# EAGLE board esp_sense (EAGLE 9.3.0)
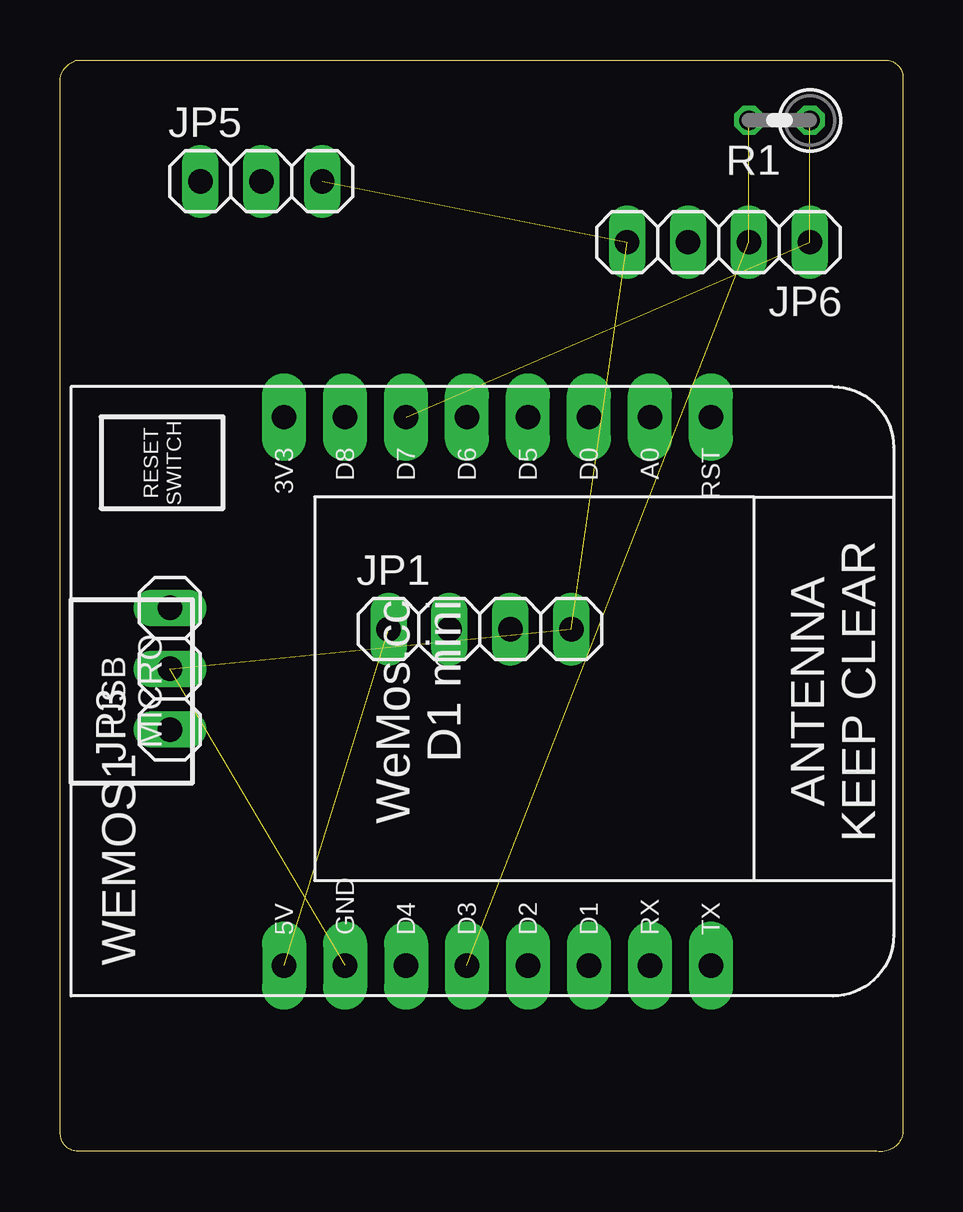
[diagram p0: board, top side]
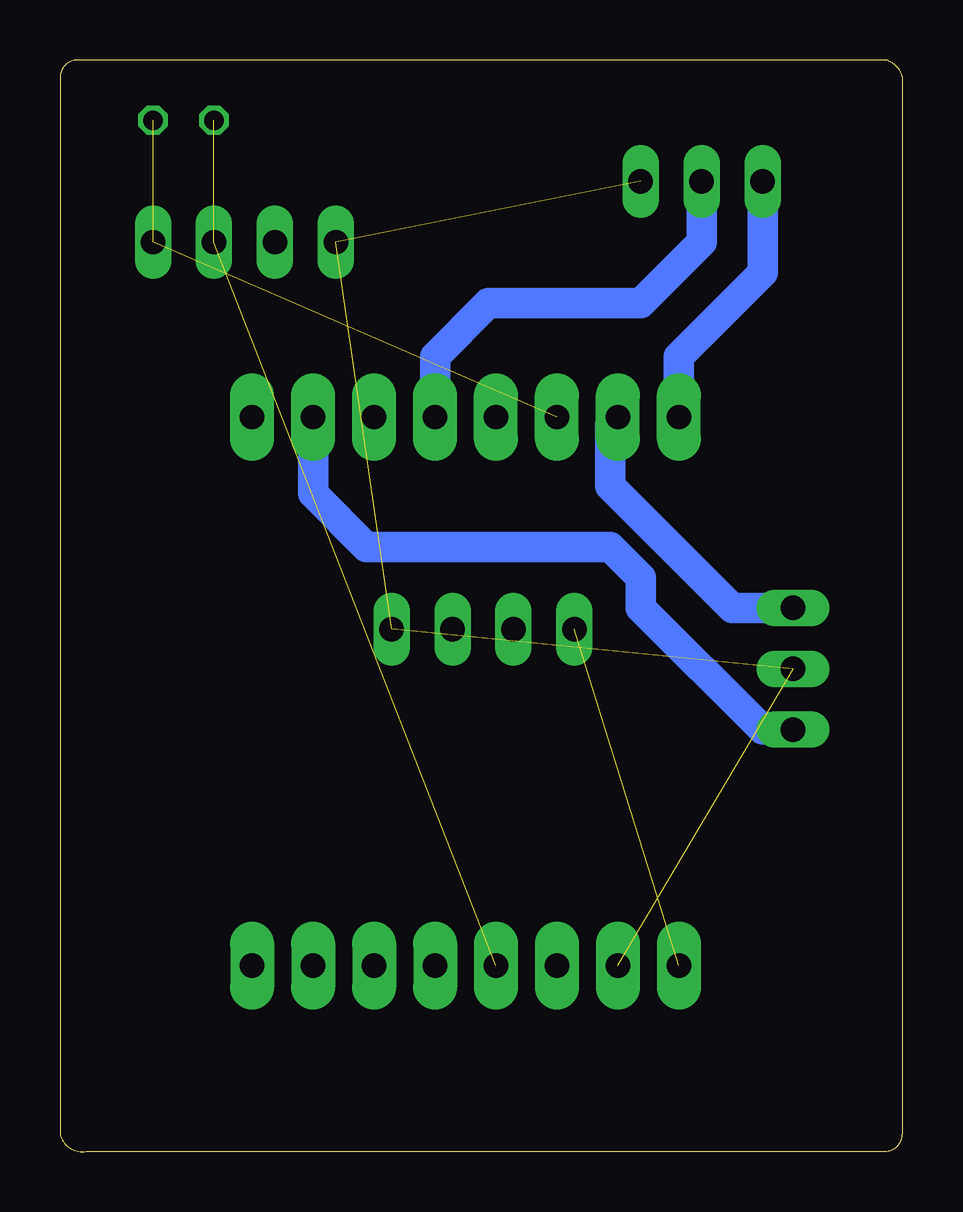
[diagram p1: board, bottom side, seen from below]

Size 35.12 x 45.51 mm. Coordinates in mm from the lower left corner, seen from the top.
Outline: 0.02,44.41 arc-90 0.75,45.51 34.39,45.51 arc-90 35.12,44.78 35.12,0.75 arc-90 34.03,0.02 0.75,0.02 arc-90 0.02,0.75 0.02,44.41
Copper layers (1*16): Top 0.035mm / dielectric 1.6mm / Bottom 0.035mm
Design rules "Elecrow_2-layer_PCB_eagle_rule *": minimum track width 6mil, minimum drill 12mil, track to track 6mil, track to pad 6mil, pad to pad 6mil, via to via 8mil, smd to smd 0mil, copper to edge 20mil, drill to drill 10mil, minimum pad ring 6mil, minimum via ring 6mil, stop-mask expansion 0mil, vias tented up to drill 100mil, thermal gap 10mil
Holes 2.75 mm at -14.12,39.88
Holes 1.3 mm at -8.29,40.91 -5.83,40.91

## Footprints (pad centres in the part's own frame; a part is rotated, then mirrored left to right if it is on the bottom)
1X04 = drill 1.016 long: 1 -3.81,0; 2 -1.27,0; 3 1.27,0; 4 3.81,0
1X03 = drill 1.016 long: 1 -2.54,0; 2 0,0; 3 2.54,0
0207/2V = drill 0.813 octagon: 1 -1.27,0; 2 1.27,0
WEMOS-D1-MINI = drill 1.016 pad 1.829 long: 3V3 -10.16,-10.16; 5V 12.7,-10.16; A0 -10.16,5.08; D0 -10.16,2.54; D1 12.7,2.54; D2 12.7,0; D3 12.7,-2.54; D4 12.7,-5.08; D5 -10.16,0; D6 -10.16,-2.54; D7 -10.16,-5.08; D8 -10.16,-7.62; GND 12.7,-7.62; RESET -10.16,7.62; RX 12.7,5.08; TX 12.7,7.62

## Placement (x,y rotation side)
JP1  [1X04]  17.5,21.78 0 top
JP3  [1X03]  4.58,20.13 90 top
JP5  [1X03]  8.39,40.45 0 top
JP6  [1X04]  27.44,37.91 180 top
R1  [0207/2V]  29.98,42.99 180 top
WEMOS1  [WEMOS-D1-MINI]  19.5,20.46 270 top

## Library data of the parts
JP1 JP3 JP5 JP6 = pinhead
R1 = rcl; SPICEPREFIX: R
WEMOS1 = SWI_COMMONS

## Nets
GND: JP1.4 JP3.2 JP5.3 JP6.4 WEMOS1.GND
N$1: JP1.1 WEMOS1.5V
N$10: JP6.2 R1.2 WEMOS1.D3
N$12: JP3.1 WEMOS1.A0
N$14: JP5.2 WEMOS1.D5
N$16: JP6.1 R1.1 WEMOS1.D7
N$17: JP3.3 WEMOS1.D8
N$18: JP5.1 WEMOS1.3V3

## Tracks (layer width: path | path; a pad name or v marks a point on that pad's centre or on a via)
GND  (4 unrouted)
N$1  (1 unrouted)
N$10  (2 unrouted)
N$12
  Bottom 1.27: JP3.1 5.85,17.59 10.93,22.67 10.93,23.94 12.2,25.21 22.36,25.21 24.58,27.43 WEMOS1.A0
N$14
  Bottom 1.27: JP5.2 8.39,37.91 10.93,35.37 17.28,35.37 19.5,33.15 WEMOS1.D5
N$16  (2 unrouted)
N$17
  Bottom 1.27: WEMOS1.D8 12.2,30.3 12.2,27.75 7.12,22.67 JP3.3
N$18
  Bottom 1.27: JP5.1 5.85,36.64 9.34,33.15 WEMOS1.3V3

## Text on the board
tTest: GND | SDA | SCL | INTB | INTA | 3.3V | 3.3Ve | 5V | 5Ve
bRestrict: WCTRL_3DSENSE | PN39XXXR0B0